# Altium PCB 驱动板.PcbDoc (part 1 of 3)
Units mil, origin at the board's own origin, x right, y up, seen from the top; angles counter-clockwise.
Board outline 6410.42 x 3130.03 mil, 2 copper layers (Top Layer, Bottom Layer); 60 components, 47 nets, 216 pads, 52 vias.
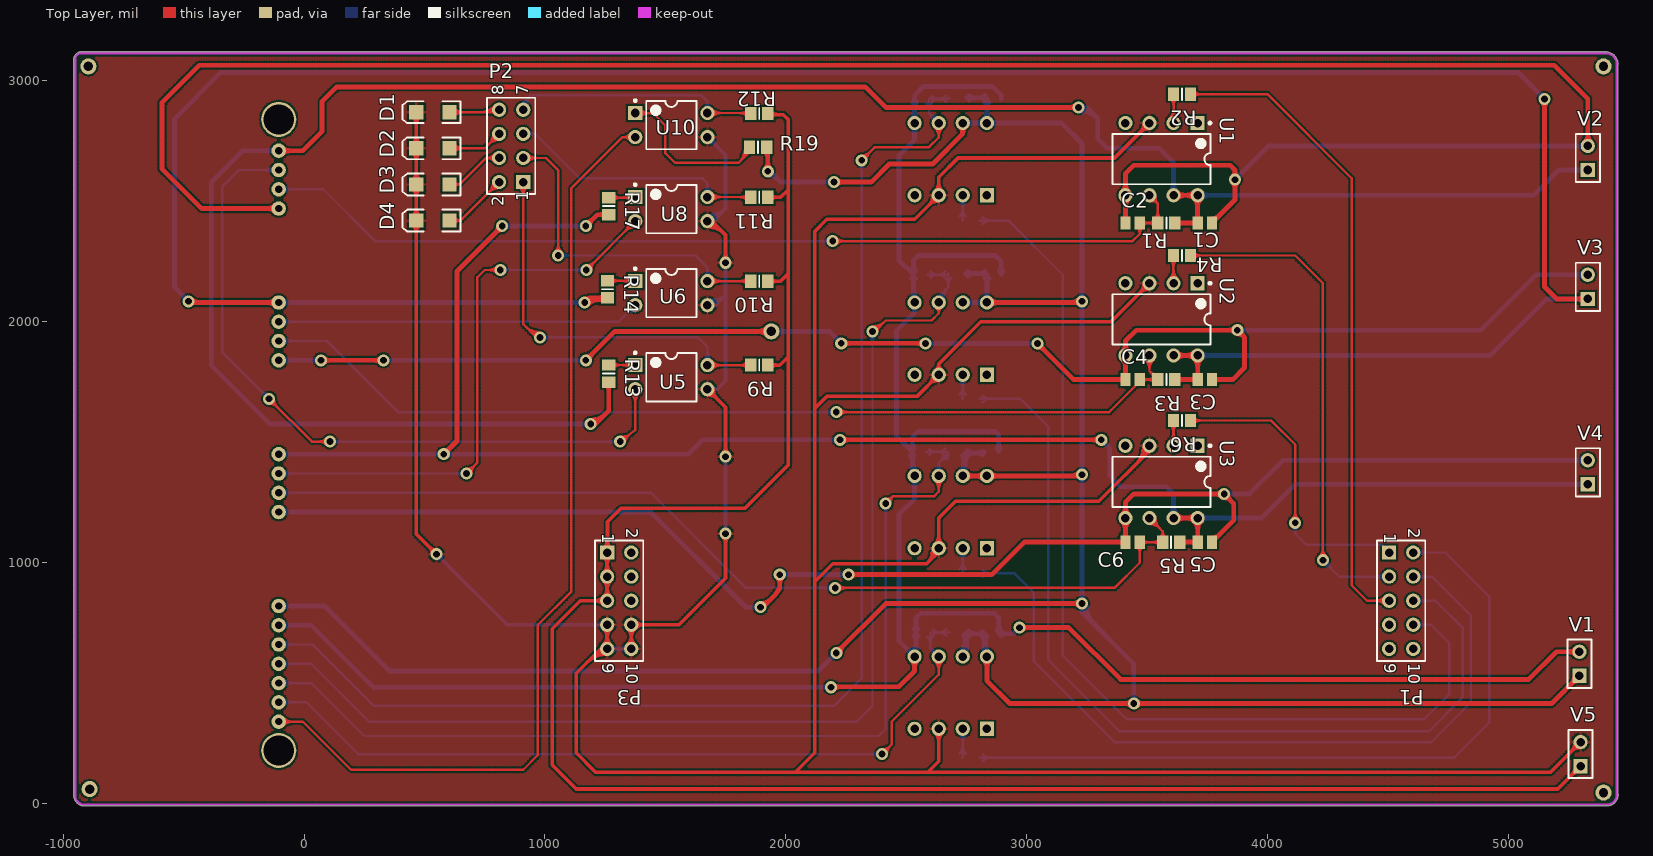
[diagram p0: Top Layer view]
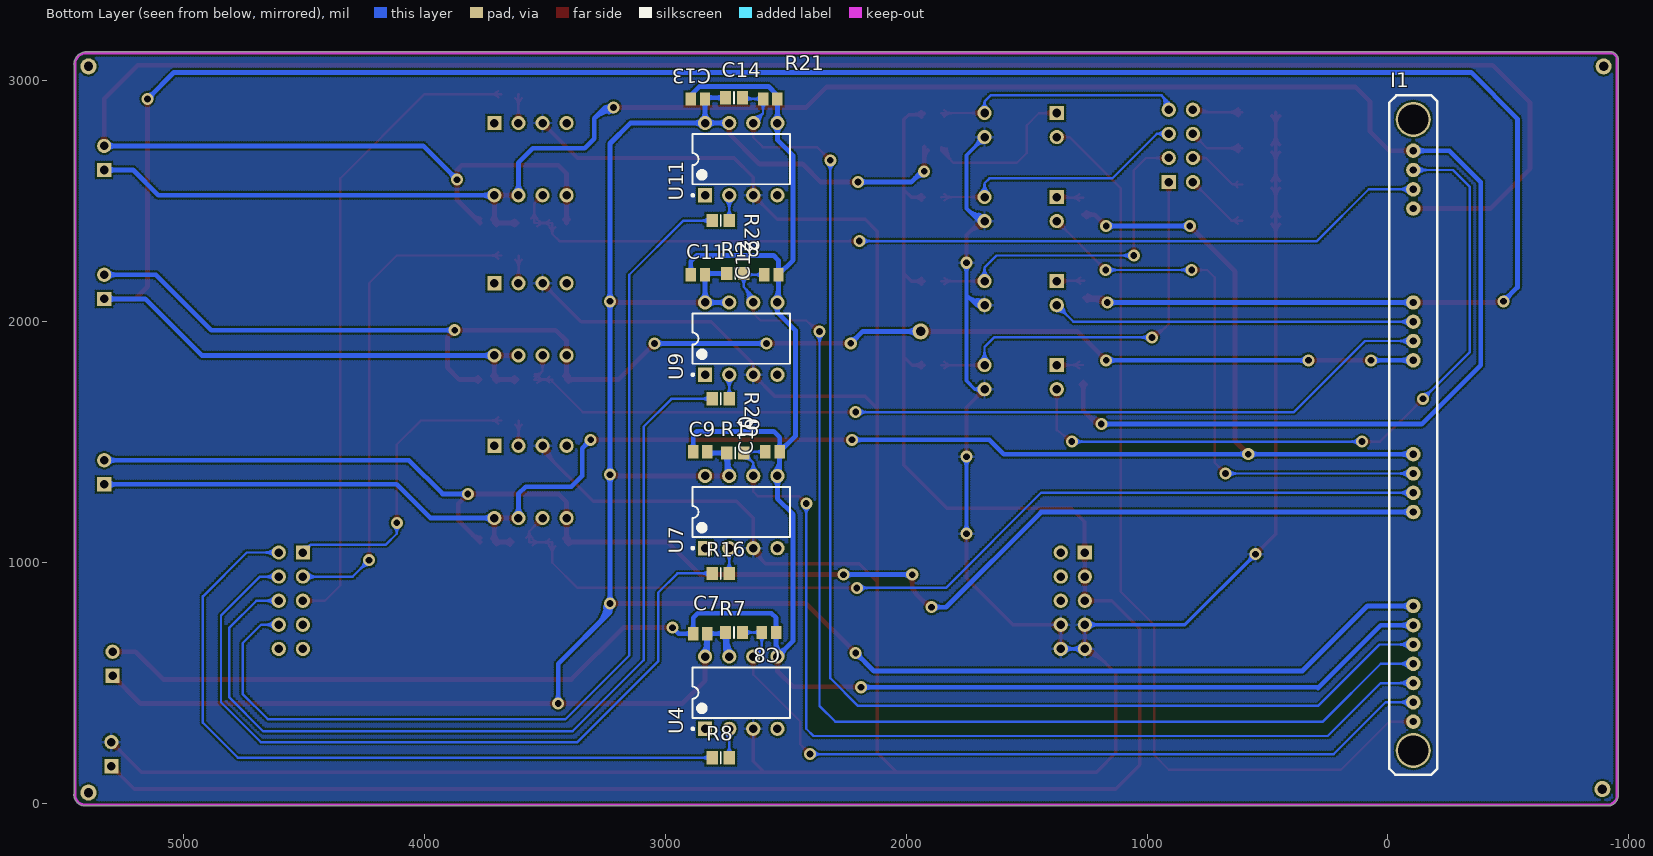
[diagram p1: Bottom Layer view, seen from below]

## Layer stack, top to bottom
Top Layer: signal copper 1.4
Dielectric: dielectric 12.6, FR-4, Dk 4.8
Bottom Layer: signal copper 1.4

## Board outline
-955.02,25 -955.02,29.84 cw(c-912.5,32.5) -955.02,35.16 -955.02,3095 cw(c-950,3095) -953.88,3098.18 cw(c-925,3090) -933.18,3118.88 cw(c-930,3115) -930,3120.02 5410,3120.02 cw(c5410,3115) 5410.55,3119.98 cw(c5405,3070) 5455.29,3070 cw(c5405,3070) 5455.01,3064.73 5455.01,40.3 cw(c5410,35) 5455.33,35 cw(c5410,35) 5454.98,29.38 cw(c5410,35) 5415.62,-9.98 cw(c5415,-5) 5415,-10.01 -920,-10.01 cw(c-920,-5) -923.41,-8.68 cw(c-912.5,32.5) -953.68,21.59 cw(c-950,25)

## Design rules (kind name [scope] priority, off if disabled: settings)
Clearance [All] p1: gap=8
HoleSize [All] p1: absolutevalues=TRUE maxlimit=130 minlimit=1 maxpercent=80.000 minpercent=20.000
MinimumSolderMaskSliver [All] p1 off: minsoldermaskwidth=10
PolygonConnect [All] p1: connectstyle=Relief reliefconductorwidth=10 reliefentries=4 polygonreliefangle="90 Angle" airgapwidth=10
RoutingVias [All] p1: holewidth=25 width=40 viastyle="Through Hole" minholewidth=28 minwidth=50 maxholewidth=28 maxwidth=50
SilkToSilkClearance [All] p1 off: silktosilkclearance=10
SilkToSolderMaskClearance [IsPad] p1 off: minsilkscreentomaskgap=10 clearancetoexposedcopper=TRUE
SolderMaskExpansion [All] p1: expansion=4
Width NGND [InNet('IPM_NGND')] p1: maxlimit=30 minlimit=10 preferedwidth=20
Width NVCC [InNet('IPM_NVCC')] p2: maxlimit=30 minlimit=10 preferedwidth=20
Width WGND [InNet('IPM_WGND')] p3: maxlimit=30 minlimit=10 preferedwidth=20
Width WVCC [InNet('IPM_WVCC')] p4: maxlimit=30 minlimit=10 preferedwidth=20
Width VGND [InNet('IPM_VGND')] p5: maxlimit=30 minlimit=10 preferedwidth=20
Width VVCC [InNet('IPM_VVCC')] p6: maxlimit=30 minlimit=10 preferedwidth=20
Width UGND [InNet('IPM_UGND')] p7: maxlimit=30 minlimit=10 preferedwidth=20
Width UVCC [InNet('IPM_UVCC')] p8: maxlimit=30 minlimit=10 preferedwidth=20
Width GND [InNet('GND')] p9: maxlimit=30 minlimit=10 preferedwidth=15
Width 5V [InNet('5V')] p10: maxlimit=30 minlimit=10 preferedwidth=15
Width [All] p11: maxlimit=10 minlimit=10 preferedwidth=10
24 further rules are at their usual default settings.

## Components (designator, comment, footprint, x,y, rotation, side; value= is the part's Value field where it differs from the comment)
C1 "Cap" C0805 3740,2410 r180 top
C2 "Cap" C0805 3440,2410 r0 top
C3 "Cap" C0805 3740,1760 r180 top
C4 "Cap" C0805 3440,1760 r0 top
C5 "Cap" C0805 3740,1085 r180 top
C6 "Cap" C0805 3440,1085 r0 top
C7 "Cap" C0805 2855,705 r180 bottom
C8 "Cap" C0805 2570,710 r0 bottom
C9 "Cap" C0805 2855,1460 r180 bottom
C10 "Cap" C0805 2555,1460 r0 bottom
C11 "Cap" C0805 2865,2195 r180 bottom
C12 "Cap" C0805 2560,2195 r0 bottom
C13 "Cap" C0805 2865,2925 r180 bottom
C14 "Cap" C0805 2565,2925 r0 bottom
D1 "LED" 3.2X1.6X1.1 535,2870 r180 top
D2 "LED" 3.2X1.6X1.1 535,2720 r180 top
D3 "LED" 3.2X1.6X1.1 535,2570 r180 top
D4 "LED" 3.2X1.6X1.1 535,2420 r180 top
I1 "ipm" ipm -105,2710 r180 bottom
P1 "Header 5X2" HDR2X5 4505,1041.85 r270 top
P2 "Header 4X2" HDR2X4 910,2580 r90 top
P3 "Header 5X2" HDR2X5 1258.46,1041.85 r270 top
R1 "Res2" 6-0805_N 3580,2410 r180 top
R2 "Res2" 6-0805_N 3645,2945 r180 top
R3 "Res2" 6-0805_N 3580,1760 r180 top
R4 "Res2" 6-0805_N 3645,2275 r180 top
R5 "Res2" 6-0805_N 3600,1085 r180 top
R6 "Res2" 6-0805_N 3645,1590 r180 top
R7 "Res2" 6-0805_N 2715,710 r180 bottom
R8 "Res2" 6-0805_N 2770,190 r180 bottom
R9 "Res" 6-0805_N 1890,1820 r180 top
R10 "Res" 6-0805_N 1890,2168.33 r180 top
R11 "Res" 6-0805_N 1890,2516.67 r180 top
R12 "Res" 6-0805_N 1890,2865 r180 top
R13 "Res Pack2" 6-0805_N 1265,1785 r270 top
R14 "Res" 6-0805_N 1260,2135 r270 top
R15 "Res2" 6-0805_N 2710,1455 r180 bottom
R16 "Res2" 6-0805_N 2770,955 r180 bottom
R17 "Res" 6-0805_N 1265,2480 r270 top
R18 "Res2" 6-0805_N 2710,2200 r180 bottom
R19 "Res" 6-0805_N 1885,2725 r0 top
R20 "Res2" 6-0805_N 2770,1680 r180 bottom
R21 "Res2" 6-0805_N 2715,2930 r180 bottom
R22 "Res2" 6-0805_N 2770,2420 r180 bottom
U1 "4504" DIP-8 3560,2675 r270 top
U2 "4504" DIP-8 3560,2010 r270 top
U3 "4504" DIP-8 3560,1335 r270 top
U4 "4504" DIP-8 2685,460 r90 bottom
U5 "P521" DIP-4 1525,1770 r0 top
U6 "P521" DIP-4 1525,2118.89 r0 top
U7 "4504" DIP-8 2685,1210 r90 bottom
U8 "P521" DIP-4 1525,2467.78 r0 top
U9 "4504" DIP-8 2685,1930 r90 bottom
U10 "P521" DIP-4 1525,2816.67 r0 top
U11 "4504" DIP-8 2685,2675 r90 bottom
V1 "Header 2" HDR1X2 5295,530 r90 top
V2 "Header 2" HDR1X2 5330,2630 r90 top
V3 "Header 2" HDR1X2 5330,2095 r90 top
V4 "Header 2" HDR1X2 5330,1325 r90 top
V5 "Header 2" HDR1X2 5300,155 r90 top

## Footprints (in the part's own frame and the unit in brackets; to place one, negate y for a bottom-side part, rotate by r counter-clockwise, add the part's x,y. Pads: shape width x height; smd on the part's side, far side on the other; paste and mask are expansions set on the pad)
3.2X1.6X1.1 [mm] "SMT LED; 2 Flat Leads"
  rect 1.5x1.5 smd: 1(-1.75,0) 2(1.75,0)
  silkscreen extent -2.9,-1.15 3.2,1.15
6-0805_N [mm] "Chip Resistor, Body 2.0x1.2mm, IPC Medium Density"
  rect 1.2x1.4 smd: 1(-0.9,0) 2(0.9,0)
  silkscreen extent 0,-0.6 0,0.6, body extent -1.07,-0.7 1.07,0.7, height 0.7
C0805 [mm] "Chip Capacitor, Body 2.0x1.3mm, IPC High Density"
  rect 1.1x1.4 smd: 1(-0.75,0) 2(0.75,0)
  body extent -1.1,-0.72 1.1,0.72, height 1.4
DIP-4 [mm] "DIP; 4 Leads; Row Spacing 7.62 mm; Pitch 2.54 mm"
  rect 1.5x1.5 hole 0.9: 1(-3.81,1.27)
  round 1.5 hole 0.9: 2(-3.81,-1.27) 3(3.81,-1.27) 4(3.81,1.27)
  silkscreen extent -3.93,-2.55 2.65,2.69, body extent -3.15,-2.5 3.15,2.5, height 5.6
DIP-8 [mm] "DIP; 8 Leads; Row Spacing 7.62 mm; Pitch 2.54 mm"
  rect 1.5x1.5 hole 0.9: 1(-3.81,3.81)
  round 1.5 hole 0.9: 2(-3.81,1.27) 3(-3.81,-1.27) 4(-3.81,-3.81) 5(3.81,-3.81) 6(3.81,-1.27) 7(3.81,1.27) 8(3.81,3.81)
  silkscreen extent -3.93,-5.15 2.65,5.24, body extent -3.6,-5.15 3.6,5.15, height 5.08
HDR1X2 [mm] "Connector; Header; 2 Position"
  rect 1.5x1.5 hole 0.9: 1(0,0)
  round 1.5 hole 0.9: 2(2.54,0)
  silkscreen extent -1.27,-1.27 3.81,1.27
HDR2X4 [mm] "Connector; Header; 4x2 Position"
  rect 1.5x1.5 hole 0.9: 1(0,0)
  round 1.5 hole 0.9: 2(0,2.54) 3(2.54,0) 4(2.54,2.54) 5(5.08,0) 6(5.08,2.54) 7(7.62,0) 8(7.62,2.54)
  silkscreen extent -1.27,-1.27 8.89,3.81
HDR2X5 [mm] "Connector; Header; 5x2 Position"
  rect 1.5x1.5 hole 0.9: 1(0,0)
  round 1.5 hole 0.9: 2(0,2.54) 3(2.54,0) 4(2.54,2.54) 5(5.08,0) 6(5.08,2.54) 7(7.62,0) 8(7.62,2.54) 9(10.16,0) 10(10.16,2.54)
  silkscreen extent -1.27,-1.27 11.43,3.81
ipm [mil]
  round 60 hole 30: 1(0,0) 2(0,-80) 3(0,-160) 4(0,-240) 5(0,-630) 6(0,-710) 7(0,-790) 8(0,-870) 9(0,-1260) 10(0,-1340) 11(0,-1420) 12(0,-1500) 13(0,-1890) 14(0,-1970) 15(0,-2050) 16(0,-2130) 17(0,-2210) 18(0,-2290) 19(0,-2370)
  round 145.67 hole 125.98: 20(0,130) 21(0,-2490)
  silkscreen extent -100,-2590 100,230

## Part data
C1 C2 C3 C4 C5 C6 C7 C8 C9 C10 C11 C12 C13 C14: "Capacitor"
P1 P3: "Header, 5-Pin, Dual row"
P2: "Header, 4-Pin, Dual row"
R1 R2 R3 R4 R5 R6 R7 R8 R15 R16 R18 R20 R21 R22: "Resistor"
R9 R10 R11 R12 R14 R17 R19: "电阻"
R13: library part Res, "电阻"
U5 U6 U8 U10: library part Optoisolator1, "4-Pin Phototransistor Optocoupler"
V1 V2 V3 V4 V5: "Header, 2-Pin"

## Free pads (board coordinates)
  round 66.93 hole 39.37: 0(1940,1960) 1(-895,3060) 2(5395,3060) 3(5395,45) 4(-890,60)

## Via types
v1: diameter 50, hole 28, Top Layer to Bottom Layer, 52 vias

## Nets (pads, with @x,y where several pads share a name; then routed paths per layer and width w, separated by ;. In a path a pad name is that pad's centre, name@x,y a point inside that pad or via, vN(x,y) a via of type N, cw(c..) or ccw(c..) an arc to the next point about the centre after c; other vN are vias at no path point)
5V: P3.1 P3.3 P3.5 R9.1 R10.1 R11.1 R12.1 V5.1 | length 9322.7
  Top Layer w15: P3.5@1231.3,841.85 1146.85,841.85 1030,725 1030,160 1130,60 5205,60 V5.1@5300,155 ; P3.5@1242.89,826.27 ccw(c1205.29,788.67) 1205.29,841.85 ccw(c1205.29,895.03) 1242.89,857.43 ccw(c1205.29,895.03) 1258.47,895.03 ccw(c1311.64,895.03) P3.5@1274.04,857.43 ; P3.3@1242.89,926.27 cw(c1205.29,888.67) 1258.47,888.67 cw(c1311.64,888.67) P3.3@1274.04,926.27 ; P3.3@1242.89,957.43 ccw(c1205.29,995.03) 1258.47,995.03 ccw(c1311.64,995.03) P3.3@1274.04,957.43 ; P3.1@1242.89,1026.27 cw(c1205.29,988.67) 1258.47,988.67 cw(c1311.64,988.67) P3.1@1274.04,1026.27 ; P3.1@1242.89,1057.43 ccw(c1201.58,1098.73) 1260,1098.73 ; P3.5@1258.47,841.85 P3.3@1258.47,941.85 P3.1@1258.47,1041.85 ; P3.1@1260,1041.85 1260,1170 1315,1225 1830,1225 2010,1405 2010,1855 ; 1260,1091.32 ccw(c1307.94,1091.32) P3.1@1274.04,1057.43 ; R9.1@1925.43,1820 1975,1820 2010,1855 ; R10.1@1925.43,2168.33 1978.33,2168.33 2010,2200 ; R11.1@1925.43,2516.67 1978.33,2516.67 2010,2548.33 ; R12.1@1925.43,2865 1930.43,2860 1990,2860 2010,2840 2010,2548.33 ; 1964.35,1820 cw(c1964.35,1858.92) 1936.83,1831.4 ccw(c1964.35,1858.92) 1964.35,1820 ; 1964.35,1820 ccw(c1964.35,1781.08) 1936.83,1808.6 cw(c1964.35,1781.08) 1964.35,1820 ; 1964.35,2168.33 cw(c1964.35,2207.26) 1936.83,2179.73 ccw(c1964.35,2207.26) 1964.35,2168.33 ; 1964.35,2168.33 ccw(c1964.35,2129.41) 1936.83,2156.93 cw(c1964.35,2129.41) 1964.35,2168.33 ; 1964.35,2516.67 cw(c1964.35,2555.59) 1936.83,2528.07 ccw(c1964.35,2555.59) 1964.35,2516.67 ; 1964.35,2516.67 ccw(c1964.35,2477.74) 1936.83,2505.27 cw(c1964.35,2477.74) 1964.35,2516.67 ; 2010,1855 2010,2200 ; 2010,2200 2010,2548.33 ; 5262.4,117.4 cw(c5300,79.79) 5300,132.97 ccw(c5300,79.79) 5262.4,117.4 ; 5262.4,117.4 ccw(c5224.79,155) 5277.97,155 cw(c5224.79,155) 5262.4,117.4 ; R12.1@1936.83,2849.66 cw(c1961.79,2824.71) 1961.79,2860 ccw(c1961.79,2824.71) R12.1@1936.83,2849.66 ; R12.1@1936.83,2872.46 ccw(c1966.92,2902.55) 1966.92,2860 cw(c1966.92,2902.55) R12.1@1936.83,2872.46
BREAK: P1.8 R22.1 | length 4605.3
  Bottom Layer w10: R22.1@2805.43,2420 2925,2420 3150,2195 3150,615 3415,350 4650,350 4755,455 4755,665 4678.15,741.85 P1.8@4605,741.85 ; 2850.39,2420 cw(c2850.39,2464.96) 2818.6,2433.17 ccw(c2850.39,2464.96) 2850.39,2420 ; 2850.39,2420 ccw(c2850.39,2375.04) 2818.6,2406.83 cw(c2850.39,2375.04) 2850.39,2420 ; 4640.07,741.85 cw(c4640.07,776.92) 4615.27,752.12 ccw(c4640.07,776.92) 4640.07,741.85 ; 4640.07,741.85 ccw(c4640.07,706.78) 4615.27,731.58 cw(c4640.07,706.78) 4640.07,741.85 ; 4664.21,741.85 cw(c4664.21,801.06) 4622.34,759.19 ccw(c4664.21,801.06) 4664.21,741.85 ; 4664.21,741.85 ccw(c4664.21,682.64) 4622.34,724.51 cw(c4664.21,682.64) 4664.21,741.85
FO: P2.7 R12.2 U10.4 | length 2046.6
  Top Layer w10: U10.4@1675,2866.67 1852.9,2866.67 R12.2@1854.57,2865 ; 1710.07,2866.67 cw(c1710.07,2901.74) 1685.27,2876.94 ccw(c1710.07,2901.74) 1710.07,2866.67 ; 1710.07,2866.67 ccw(c1710.07,2831.59) 1685.27,2856.39 cw(c1710.07,2831.59) 1710.07,2866.67 ; 1734.21,2866.67 cw(c1734.21,2925.88) 1692.34,2884.01 ccw(c1734.21,2925.88) 1734.21,2866.67 ; 1734.21,2866.67 ccw(c1734.21,2807.45) 1692.34,2849.32 cw(c1734.21,2807.45) 1734.21,2866.67 ; 1805.59,2866.67 cw(c1805.59,2816.02) 1841.4,2851.83 ccw(c1805.59,2816.02) 1805.59,2866.67 ; 1813.63,2866.67 ccw(c1813.63,2905.93) 1841.4,2878.17 cw(c1813.63,2905.93) 1813.63,2866.67 ; 1829.73,2866.67 cw(c1829.73,2840.16) 1848.47,2858.9 ccw(c1829.73,2840.16) 1829.73,2866.67
  Bottom Layer w10: P2.7@910,2880 910,2910 ; U10.4@1675,2866.67 1675,2915 ; 910,2910 cw(c903.92,2910) 905.13,2904.04 ccw(c903.92,2910) 910,2910 ; 910,2910 ccw(c916.08,2910) 914.87,2904.04 cw(c916.08,2910) 910,2910 ; 910,2910 940,2940 ; 940,2940 ccw(c970.13,2909.87) 931.97,2890.91 cw(c970.13,2909.87) 940,2940 ; 940,2940 1650,2940 1675,2915 ; 1675,2915 cw(c1639.64,2915) 1660.52,2886.46 ccw(c1639.64,2915) 1675,2915 ; 1675,2915 ccw(c1710.36,2915) 1689.48,2886.46 cw(c1710.36,2915) 1675,2915 ; P2.7@905.1,2877.57 cw(c930.69,2890.28) 910.49,2910.49 ccw(c930.69,2890.28) P2.7@905.1,2877.57 ; P2.7@914.05,2882.01 cw(c943.84,2896.81) 920.32,2920.32 ccw(c943.84,2896.81) P2.7@914.05,2882.01 ; P2.7@923.01,2886.46 cw(c956.98,2903.34) 930.16,2930.16 ccw(c956.98,2903.34) P2.7@923.01,2886.46
GND: D1.2 D2.2 D3.2 D4.2 P3.7 P3.8 P3.9 P3.10 U1.3 U2.3 U3.3 U4.3 U5.3 U6.3 U7.3 U8.3 U9.3 U10.3 U11.3 V5.2 | length 25348.2
  Top Layer w15: D1.2@466.1,2870 D2.2@466.1,2720 D3.2@466.1,2570 D4.2@466.1,2420 466.1,1118.9 v1(550,1035) ; 524.04,1059.45 cw(c515.6,1027.96) v1@547.55,1034.5 ; 525.55,1060.96 ccw(c557.04,1069.4) v1@550.5,1037.45 ; 1174.49,585.04 cw(c1258.47,501.06) P3.9@1258.47,619.82 ; 1200.09,610.64 cw(c1258.47,552.27) P3.9@1258.47,634.82 ; 1225.7,636.25 cw(c1258.47,603.49) P3.9@1258.47,649.82 ; P3.9@1242.89,657.43 ccw(c1205.29,695.03) 1258.47,695.03 ccw(c1311.64,695.03) P3.9@1274.04,657.43 ; P3.7@1242.89,726.27 cw(c1205.29,688.67) 1258.47,688.67 cw(c1311.64,688.67) P3.7@1274.04,726.27 ; P3.7@1258.47,741.85 P3.9@1258.47,641.85 1231.3,641.85 1130,540.55 1130,210 1210,130 2040,130 ; P3.10@1342.89,657.43 ccw(c1305.29,695.03) 1358.47,695.03 ccw(c1411.64,695.03) P3.10@1374.04,657.43 ; P3.8@1342.89,726.27 cw(c1305.29,688.67) 1358.47,688.67 cw(c1411.64,688.67) 1374.04,726.27 cw(c1411.64,688.67) 1411.64,741.85 cw(c1411.64,795.03) P3.8@1374.04,757.43 ; P3.10@1358.47,641.85 P3.8@1358.47,741.85 1556.85,741.85 1750,935 v1(1750,1120) ; U5.3@1667.19,1718.4 ccw(c1698.58,1724.83) 1690.29,1693.88 ; U8.3@1667.74,2414.48 ccw(c1708.16,2432.82) 1696.68,2389.94 ; U5.3@1675,1720 1750,1645 v1(1750,1440) ; U8.3@1675,2417.78 1692.22,2417.78 1750,2360 v1(1750,2245) ; U5.3@1676.6,1727.81 cw(c1670.17,1696.42) 1701.12,1704.71 ; U8.3@1681.4,2420.68 ccw(c1745.56,2449.77) 1727.32,2381.73 ; U8.3@1686.01,2398.7 cw(c1701.02,2372.72) 1708.78,2401.7 ; 2120,920 2195,995 2585,995 2635,1045 U7.3@2635,1060 2635,1185 2705,1255 3300,1255 3510,1465 U3.3@3510,1485 ; 2599.42,1009.43 cw(c2663.81,992.18) U7.3@2637.75,1053.53 ; 2607.39,1039.15 cw(c2648.54,1028.12) U7.3@2631.88,1067.34 ; 2608.88,1764.71 cw(c2639.83,1756.42) U9.3@2633.4,1787.81 ; 2608.88,2509.71 cw(c2639.83,2501.42) U11.3@2633.4,2532.81 ; U7.3@2615.92,1048.99 cw(c2589.94,1033.98) 2618.92,1026.22 ; 2619.71,1753.88 ccw(c2611.42,1784.83) U9.3@2642.81,1778.4 ; 2619.71,2498.88 ccw(c2611.42,2529.83) U11.3@2642.81,2523.4 ; U4.3@2635,310 2635,175 2590,130 ; 3473.37,1430.48 cw(c3546.13,1410.99) U3.3@3513.08,1478.68 ; 3481.89,1462.29 cw(c3526.98,1450.21) U3.3@3506.5,1492.16 ; 3483.88,2144.71 cw(c3514.83,2136.42) U2.3@3508.4,2167.81 ; 3483.88,2809.71 cw(c3514.83,2801.42) U1.3@3508.4,2832.81 ; U3.3@3490.92,1473.99 cw(c3464.94,1458.98) 3493.92,1451.22 ; 3494.71,2133.88 ccw(c3486.42,2164.83) U2.3@3517.81,2158.4 ; 3494.71,2798.88 ccw(c3486.42,2829.83) U1.3@3517.81,2823.4 ; U2.3@3510,2160 3350,2000 2810,2000 2635,1825 ; U1.3@3510,2825 3365,2680 2715,2680 2635,2600 U11.3@2635,2525 2535,2425 2170,2425 2120,2375 2120,1640 ; 5273.88,239.71 cw(c5304.83,231.42) V5.2@5298.4,262.81 ; 5284.71,228.88 ccw(c5276.42,259.83) V5.2@5307.81,253.4 ; V5.2@5300,255 5175,130 2590,130 ; 466.1,2366.82 cw(c519.28,2366.82) 481.68,2404.42 ccw(c519.28,2366.82) 466.1,2366.82 ; 466.1,2366.82 ccw(c412.92,2366.82) 450.53,2404.42 cw(c412.92,2366.82) 466.1,2366.82 ; 466.1,2473.18 cw(c412.92,2473.18) 450.53,2435.58 ccw(c412.92,2473.18) 466.1,2473.18 ; 466.1,2473.18 ccw(c519.28,2473.18) 481.68,2435.58 cw(c519.28,2473.18) 466.1,2473.18 ; 466.1,2516.82 cw(c519.28,2516.82) 481.68,2554.42 ccw(c519.28,2516.82) 466.1,2516.82 ; 466.1,2516.82 ccw(c412.92,2516.82) 450.53,2554.42 cw(c412.92,2516.82) 466.1,2516.82 ; 466.1,2623.18 cw(c412.92,2623.18) 450.53,2585.58 ccw(c412.92,2623.18) 466.1,2623.18 ; 466.1,2623.18 ccw(c519.28,2623.18) 481.68,2585.58 cw(c519.28,2623.18) 466.1,2623.18 ; 466.1,2666.82 cw(c519.28,2666.82) 481.68,2704.42 ccw(c519.28,2666.82) 466.1,2666.82 ; 466.1,2666.82 ccw(c412.92,2666.82) 450.53,2704.42 cw(c412.92,2666.82) 466.1,2666.82 ; 466.1,2773.18 cw(c412.92,2773.18) 450.53,2735.58 ccw(c412.92,2773.18) 466.1,2773.18 ; 466.1,2773.18 ccw(c519.28,2773.18) 481.68,2735.58 cw(c519.28,2773.18) 466.1,2773.18 ; 466.1,2816.82 cw(c519.28,2816.82) 481.68,2854.42 ccw(c519.28,2816.82) 466.1,2816.82 ; 466.1,2816.82 ccw(c412.92,2816.82) 450.53,2854.42 cw(c412.92,2816.82) 466.1,2816.82 ; 520.13,1064.87 cw(c490.25,1035) 532.5,1035 ccw(c490.25,1035) 520.13,1064.87 ; 520.13,1064.87 ccw(c550,1094.75) 550,1052.5 cw(c550,1094.75) 520.13,1064.87 ; 1712.6,1682.4 cw(c1750.21,1720) 1697.03,1720 ccw(c1750.21,1720) 1712.6,1682.4 ; 1712.6,1682.4 ccw(c1675,1644.79) 1675,1697.97 cw(c1675,1644.79) 1712.6,1682.4 ; 1750,1077.75 cw(c1792.25,1077.75) 1762.37,1107.63 ccw(c1792.25,1077.75) 1750,1077.75 ; 1750,1077.75 ccw(c1707.75,1077.75) 1737.63,1107.63 cw(c1707.75,1077.75) 1750,1077.75 ; 1750,1482.25 cw(c1707.75,1482.25) 1737.63,1452.37 ccw(c1707.75,1482.25) 1750,1482.25 ; 1750,1482.25 ccw(c1792.25,1482.25) 1762.37,1452.37 cw(c1792.25,1482.25) 1750,1482.25 ; 1750,2287.25 cw(c1707.75,2287.25) 1737.63,2257.37 ccw(c1707.75,2287.25) 1750,2287.25 ; 1750,2287.25 ccw(c1792.25,2287.25) 1762.37,2257.37 cw(c1792.25,2287.25) 1750,2287.25 ; 2040,130 2590,130 ; 2040,130 2120,210 2120,1640 ; 2120,1640 2170,1690 2545,1690 U9.3@2635,1780 2635,1825 ; 2597.4,1742.4 cw(c2635,1704.79) 2635,1757.97 ccw(c2635,1704.79) 2597.4,1742.4 ; 2597.4,1742.4 ccw(c2559.79,1780) 2612.97,1780 cw(c2559.79,1780) 2597.4,1742.4 ; 2597.4,2487.4 cw(c2635,2449.79) 2635,2502.97 ccw(c2635,2449.79) 2597.4,2487.4 ; 2597.4,2487.4 ccw(c2559.79,2525) 2612.97,2525 cw(c2559.79,2525) 2597.4,2487.4 ; 2635,256.82 cw(c2688.18,256.82) 2650.58,294.42 ccw(c2688.18,256.82) 2635,256.82 ; 2635,256.82 ccw(c2581.82,256.82) 2619.42,294.42 cw(c2581.82,256.82) 2635,256.82 ; 2635,1113.18 cw(c2581.82,1113.18) 2619.42,1075.58 ccw(c2581.82,1113.18) 2635,1113.18 ; 2635,1113.18 ccw(c2688.18,1113.18) 2650.58,1075.58 cw(c2688.18,1113.18) 2635,1113.18 ; 2635,1825 cw(c2600.05,1825) 2621.49,1797.4 ccw(c2600.05,1825) 2635,1825 ; 2635,1825 ccw(c2669.95,1825) 2648.51,1797.4 cw(c2669.95,1825) 2635,1825 ; 2635,2578.18 cw(c2581.82,2578.18) 2619.42,2540.58 ccw(c2581.82,2578.18) 2635,2578.18 ; 2635,2578.18 ccw(c2688.18,2578.18) 2650.58,2540.58 cw(c2688.18,2578.18) 2635,2578.18 ; 3472.4,2122.4 cw(c3510,2084.79) 3510,2137.97 ccw(c3510,2084.79) 3472.4,2122.4 ; 3472.4,2122.4 ccw(c3434.79,2160) 3487.97,2160 cw(c3434.79,2160) 3472.4,2122.4 ; 3472.4,2787.4 cw(c3510,2749.79) 3510,2802.97 ccw(c3510,2749.79) 3472.4,2787.4 ; 3472.4,2787.4 ccw(c3434.79,2825) 3487.97,2825 cw(c3434.79,2825) 3472.4,2787.4 ; 5262.4,217.4 cw(c5300,179.79) 5300,232.97 ccw(c5300,179.79) 5262.4,217.4 ; 5262.4,217.4 ccw(c5224.79,255) 5277.97,255 cw(c5224.79,255) 5262.4,217.4 ; U8.3@1675,2395.75 cw(c1675,2300.99) 1742,2368 ccw(c1675,2300.99) U8.3@1675,2395.75 ; U8.3@1675,2410.75 cw(c1675,2352.21) 1716.4,2393.6 ccw(c1675,2352.21) U8.3@1675,2410.75 ; 2586.79,996.79 ccw(c2523.58,1060) 2612.97,1060 cw(c2523.58,1060) 2586.79,996.79 ; 2612.4,1022.4 ccw(c2574.79,1060) 2627.97,1060 cw(c2574.79,1060) 2612.4,1022.4 ; 2623,1033 cw(c2635,1021.01) 2635,1037.97 ccw(c2635,1021.01) 2623,1033 ; 3458.25,1413.25 ccw(c3386.51,1485) 3487.97,1485 cw(c3386.51,1485) 3458.25,1413.25 ; 3483.86,1438.86 ccw(c3437.72,1485) 3502.97,1485 cw(c3437.72,1485) 3483.86,1438.86
  Bottom Layer w15: v1(550,1035) 843.15,741.85 P3.7@1258.47,741.85 ; P3.7@1242.89,726.27 ccw(c1205.29,688.67) 1205.29,741.85 ccw(c1205.29,795.03) P3.7@1242.89,757.43 ; P3.9@1258.47,641.85 P3.10@1358.47,641.85 ; P3.9@1274.04,626.27 cw(c1311.64,588.67) 1311.64,641.85 cw(c1311.64,695.03) P3.9@1274.04,657.43 ; P3.10@1342.89,626.27 ccw(c1305.29,588.67) 1305.29,641.85 ccw(c1305.29,695.03) P3.10@1342.89,657.43 ; U8.3@1668,2421.6 cw(c1711.3,2397.94) 1699.31,2445.8 ; U6.3@1669.22,2074.38 cw(c1707.94,2037.61) 1706.56,2090.99 ; U5.3@1675,1720 1715,1720 ; U6.3@1675,2068.89 1708.89,2068.89 ; U8.3@1675,2417.78 1697.78,2417.78 1750,2470 ; U10.3@1675,2766.67 1750,2691.67 1750,2470 ; U6.3@1680.1,2064.05 cw(c1709.21,2036.41) 1708.17,2076.54 ; U8.3@1681.17,2414.41 cw(c1752.22,2375.57) 1732.55,2454.12 ; U8.3@1686.33,2436.67 ccw(c1701.76,2462.4) 1709.04,2433.3 ; U6.3@1690.17,2084.86 ccw(c1710.82,2106.62) 1711.6,2076.63 ; v1(1750,1120) v1(1750,1440) ; v1(1750,2245) 1750,2110 ; 579.87,1005.13 cw(c609.75,1035) 567.5,1035 ccw(c609.75,1035) 579.87,1005.13 ; 579.87,1005.13 ccw(c550,975.25) 550,1017.5 cw(c550,975.25) 579.87,1005.13 ; 1708.89,2068.89 cw(c1708.89,2083.94) 1695.13,2077.83 ccw(c1708.89,2083.94) 1708.89,2068.89 ; 1708.89,2068.89 ccw(c1708.89,2053.84) 1695.13,2059.95 cw(c1708.89,2053.84) 1708.89,2068.89 ; 1708.89,2068.89 1750,2110 ; 1712.6,2729.06 cw(c1750.21,2766.67) 1697.03,2766.67 ccw(c1750.21,2766.67) 1712.6,2729.06 ; 1712.6,2729.06 ccw(c1675,2691.46) 1675,2744.64 cw(c1675,2691.46) 1712.6,2729.06 ; 1715,1720 cw(c1715,1745.3) 1693.62,1731.78 ccw(c1715,1745.3) 1715,1720 ; 1715,1720 ccw(c1715,1694.7) 1693.62,1708.22 cw(c1715,1694.7) 1715,1720 ; 1715,1720 1750,1755 1750,2110 ; 1750,1162.25 cw(c1707.75,1162.25) 1737.63,1132.37 ccw(c1707.75,1162.25) 1750,1162.25 ; 1750,1162.25 ccw(c1792.25,1162.25) 1762.37,1132.37 cw(c1792.25,1162.25) 1750,1162.25 ; 1750,1397.75 cw(c1792.25,1397.75) 1762.37,1427.63 ccw(c1792.25,1397.75) 1750,1397.75 ; 1750,1397.75 ccw(c1707.75,1397.75) 1737.63,1427.63 cw(c1707.75,1397.75) 1750,1397.75 ; 1750,2110 cw(c1697.5,2162.5) 1680.15,2090.31 ccw(c1697.5,2162.5) 1750,2110 ; 1750,2202.75 cw(c1792.25,2202.75) 1762.37,2232.63 ccw(c1792.25,2202.75) 1750,2202.75 ; 1750,2202.75 ccw(c1707.75,2202.75) 1737.63,2232.63 cw(c1707.75,2202.75) 1750,2202.75 ; 1750,2470 cw(c1677.07,2542.93) 1675.36,2439.8 ccw(c1677.07,2542.93) 1750,2470 ; U6.3@1673.14,2061.14 ccw(c1682.82,2101.44) 1712.13,2072.13 cw(c1682.82,2101.44) U6.3@1673.14,2061.14 ; U8.3@1675.12,2424.8 ccw(c1676.25,2493.7) 1724.98,2444.98 cw(c1676.25,2493.7) U8.3@1675.12,2424.8 ; U6.3@1676.64,2075.72 ccw(c1690.16,2131.97) 1731.06,2091.06 cw(c1690.16,2131.97) U6.3@1676.64,2075.72
IPM_BREAK: C14.2 I1.15 R21.2 U11.6 | length 7088.2
  Top Layer w10: 2340.2,2696.75 ccw(c2349.24,2662.99) v1(2315,2670) ; 2341.75,2695.2 cw(c2307.99,2704.24) v1(2315,2670) ; U11.6@2635,2825 2635,2765 2595,2725 2370,2725 v1(2315,2670) ; 2349.14,2704.14 cw(c2315,2738.28) 2315,2690 ccw(c2315,2738.28) 2349.14,2704.14 ; 2349.14,2704.14 ccw(c2383.28,2670) 2335,2670 cw(c2383.28,2670) 2349.14,2704.14 ; 2635,2765.79 cw(c2694.21,2765.79) 2652.34,2807.66 ccw(c2694.21,2765.79) 2635,2765.79 ; 2635,2765.79 ccw(c2575.79,2765.79) 2617.66,2807.66 cw(c2575.79,2765.79) 2635,2765.79 ; 2635,2789.93 cw(c2670.07,2789.93) 2645.27,2814.73 ccw(c2670.07,2789.93) 2635,2789.93 ; 2635,2789.93 ccw(c2599.93,2789.93) 2624.73,2814.73 cw(c2599.93,2789.93) 2635,2789.93
  Bottom Layer w10: I1.15@-105,660 35,660 290,405 2200,405 2315,520 v1(2315,2670) ; 2604.81,2849.04 ccw(c2643.74,2858.47) U11.6@2633.62,2819.71 ; 2610.96,2855.19 cw(c2601.53,2816.26) U11.6@2640.29,2826.38 ; U11.6@2635,2825 2594.53,2865.47 ; R21.2@2679.57,2930 2674.57,2925 C14.2@2594.53,2925 2594.53,2865.47 ; -68.79,660 cw(c-68.79,696.21) -94.39,670.61 ccw(c-68.79,696.21) -68.79,660 ; -68.79,660 ccw(c-68.79,623.79) -94.39,649.39 cw(c-68.79,623.79) -68.79,660 ; -44.64,660 cw(c-44.64,720.36) -87.32,677.68 ccw(c-44.64,720.36) -44.64,660 ; -44.64,660 ccw(c-44.64,599.64) -87.32,642.32 cw(c-44.64,599.64) -44.64,660 ; 2315,2621.72 cw(c2363.28,2621.72) 2329.14,2655.86 ccw(c2363.28,2621.72) 2315,2621.72 ; 2315,2621.72 ccw(c2266.72,2621.72) 2300.86,2655.86 cw(c2266.72,2621.72) 2315,2621.72 ; 2594.53,2865.47 cw(c2555.99,2826.93) 2610.48,2825.6 ccw(c2555.99,2826.93) 2594.53,2865.47 ; 2594.53,2865.47 ccw(c2633.07,2904.01) 2634.4,2849.52 cw(c2633.07,2904.01) 2594.53,2865.47 ; 2594.53,2878.89 cw(c2634.73,2878.89) 2606.3,2907.32 ccw(c2634.73,2878.89) 2594.53,2878.89 ; 2594.53,2878.89 ccw(c2554.32,2878.89) 2582.75,2907.32 cw(c2554.32,2878.89) 2594.53,2878.89 ; 2611.03,2848.97 cw(c2588.2,2826.14) 2620.48,2825.35 ccw(c2588.2,2826.14) 2611.03,2848.97 ; 2611.03,2848.97 ccw(c2633.86,2871.8) 2634.65,2839.52 cw(c2633.86,2871.8) 2611.03,2848.97 ; 2634.73,2925 cw(c2634.73,2965.21) 2606.3,2936.78 ccw(c2634.73,2965.21) 2634.73,2925 ; 2634.73,2925 ccw(c2634.73,2884.79) 2606.3,2913.22 cw(c2634.73,2884.79) 2634.73,2925 ; 2632.04,2925 ccw(c2632.04,2973.59) 2666.4,2939.23 cw(c2632.04,2973.59) 2632.04,2925 ; 2637.17,2925 cw(c2637.17,2883.67) 2666.4,2912.9 ccw(c2637.17,2883.67) 2637.17,2925
IPM_FO: I1.19 U10.2 | length 4502.8
  Top Layer w10: I1.19@-105,340 -5,340 195,140 910,140 970,200 970,740 1110,880 1110,2555 1321.67,2766.67 ; U10.2@1375,2766.67 1321.67,2766.67 ; -68.79,340 cw(c-68.79,376.21) -94.39,350.61 ccw(c-68.79,376.21) -68.79,340 ; -68.79,340 ccw(c-68.79,303.79) -94.39,329.39 cw(c-68.79,303.79) -68.79,340 ; -44.64,340 cw(c-44.64,400.36) -87.32,357.68 ccw(c-44.64,400.36) -44.64,340 ; -44.64,340 ccw(c-44.64,279.64) -87.32,322.32 cw(c-44.64,279.64) -44.64,340 ; 1321.67,2766.67 cw(c1321.67,2720.95) 1356.38,2750.7 ccw(c1321.67,2720.95) 1321.67,2766.67 ; 1321.67,2766.67 ccw(c1321.67,2812.38) 1356.38,2782.63 cw(c1321.67,2812.38) 1321.67,2766.67 ; 1343.41,2766.67 cw(c1343.41,2739.59) 1363.97,2757.21 ccw(c1343.41,2739.59) 1343.41,2766.67 ; 1343.41,2766.67 ccw(c1343.41,2793.74) 1363.97,2776.12 cw(c1343.41,2793.74) 1343.41,2766.67
IPM_NGND: C7.1 C8.1 C9.1 C10.1 C11.1 C12.1 C13.1 C14.1 I1.14 U4.5 U7.5 U9.5 U11.5 V1.2 | length 12915.8
  Top Layer w20: v1(2187.5,482.5) 2190,485 2470,485 2535,550 U4.5@2535,610 ; v1(2970,730) 3175,730 3390,515 5085,515 5200,630 V1.2@5295,630 ; 2535,562.86 cw(c2582.14,562.86) 2548.81,596.19 ccw(c2582.14,562.86) 2535,562.86 ; 2535,562.86 ccw(c2487.86,562.86) 2521.19,596.19 cw(c2487.86,562.86) 2535,562.86 ; 3006.21,730 cw(c3006.21,766.21) 2980.61,740.61 ccw(c3006.21,766.21) 3006.21,730 ; 3006.21,730 ccw(c3006.21,693.79) 2980.61,719.39 cw(c3006.21,693.79) 3006.21,730 ; 5247.86,630 cw(c5247.86,582.86) 5281.19,616.19 ccw(c5247.86,582.86) 5247.86,630 ; 5247.86,630 ccw(c5247.86,677.14) 5281.19,643.81 cw(c5247.86,677.14) 5247.86,630 ; v1@2198.11,471.89 cw(c2229.75,440.25) 2229.75,485 ccw(c2229.75,440.25) v1@2198.11,471.89 ; v1@2198.11,493.11 ccw(c2217.68,512.68) 2217.68,485 cw(c2217.68,512.68) v1@2198.11,493.11
  Bottom Layer w20: I1.14@-105,740 30,740 290,480 ; 287.5,482.5 v1(2187.5,482.5) ; C9.1@2884.53,1460 2884.53,1530.47 2870,1545 2550,1545 2525.47,1520.47 C10.1@2525.47,1460 ; C11.1@2894.53,2195 2894.53,2250.47 2870,2275 2550,2275 2530.47,2255.47 C12.1@2530.47,2195 ; C13.1@2894.53,2925 2894.53,2940.61 2858.14,2977 2571.86,2977 2535.47,2940.61 C14.1@2535.47,2925 2535,2924.53 U11.5@2535,2825 2535,2755 2470,2690 2470,2255.47 C12.1@2530.47,2195 ; v1(2970,730) 2945,705 C7.1@2884.53,705 2884.53,770.47 2865,790 2560,790 2540.47,770.47 C8.1@2540.47,710 2540.47,615.47 U4.5@2535,610 2470,675 2470,1200 2535,1265 U7.5@2535,1360 2525.47,1369.53 C10.1@2525.47,1460 ; -56.72,740 cw(c-56.72,788.28) -90.86,754.14 ccw(c-56.72,788.28) -56.72,740 ; -56.72,740 ccw(c-56.72,691.72) -90.86,725.86 cw(c-56.72,691.72) -56.72,740 ; 2151.29,482.5 cw(c2151.29,446.29) 2176.89,471.89 ccw(c2151.29,446.29) 2151.29,482.5 ; 2151.29,482.5 ccw(c2151.29,518.71) 2176.89,493.11 cw(c2151.29,518.71) 2151.29,482.5 ; 2501.66,643.34 cw(c2468.33,610) 2515.47,610 ccw(c2468.33,610) 2501.66,643.34 ; 2501.66,643.34 ccw(c2535,676.67) 2535,629.53 cw(c2535,676.67) 2501.66,643.34 ; 2525.47,1425.96 cw(c2553.61,1425.96) 2533.71,1445.85 ccw(c2553.61,1425.96) 2525.47,1425.96 ; 2525.47,1425.96 ccw(c2497.34,1425.96) 2517.23,1445.85 cw(c2497.34,1425.96) 2525.47,1425.96 ; C10.1@2525.47,1460 2460,1525.47 2460,1965 2535,2040 ; 2525.47,1494.04 cw(c2497.34,1494.04) 2517.23,1474.15 ccw(c2497.34,1494.04) 2525.47,1494.04 ; 2525.47,1494.04 ccw(c2553.61,1494.04) 2533.71,1474.15 cw(c2553.61,1494.04) 2525.47,1494.04 ; 2530.47,2160.96 cw(c2558.61,2160.96) 2538.71,2180.85 ccw(c2558.61,2160.96) 2530.47,2160.96 ; 2530.47,2160.96 ccw(c2502.34,2160.96) 2522.23,2180.85 cw(c2502.34,2160.96) 2530.47,2160.96 ; C12.1@2530.47,2195 2530.47,2084.53 U9.5@2535,2080 2535,2040 ; 2530.47,2229.04 cw(c2502.34,2229.04) 2522.23,2209.15 ccw(c2502.34,2229.04) 2530.47,2229.04 ; 2530.47,2229.04 ccw(c2558.61,2229.04) 2538.71,2209.15 cw(c2558.61,2229.04) 2530.47,2229.04 ; 2535,1312.86 cw(c2582.14,1312.86) 2548.81,1346.19 ccw(c2582.14,1312.86) 2535,1312.86 ; 2535,1312.86 ccw(c2487.86,1312.86) 2521.19,1346.19 cw(c2487.86,1312.86) 2535,1312.86 ; 2535,2040 cw(c2566.2,2040) 2547.01,2064.6 ccw(c2566.2,2040) 2535,2040 ; 2535,2040 ccw(c2503.8,2040) 2522.99,2064.6 cw(c2503.8,2040) 2535,2040 ; 2535,2777.86 cw(c2582.14,2777.86) 2548.81,2811.19 ccw(c2582.14,2777.86) 2535,2777.86 ; 2535,2777.86 ccw(c2487.86,2777.86) 2521.19,2811.19 cw(c2487.86,2777.86) 2535,2777.86 ; 2535,2872.14 cw(c2487.86,2872.14) 2521.19,2838.81 ccw(c2487.86,2872.14) 2535,2872.14 ; 2535,2872.14 ccw(c2582.14,2872.14) 2548.81,2838.81 cw(c2582.14,2872.14) 2535,2872.14 ; 2540.47,675.96 cw(c2568.61,675.96) 2548.71,695.85 ccw(c2568.61,675.96) 2540.47,675.96 ; 2540.47,675.96 ccw(c2512.34,675.96) 2532.23,695.85 cw(c2512.34,675.96) 2540.47,675.96 ; 2540.47,744.04 cw(c2512.34,744.04) 2532.23,724.15 ccw(c2512.34,744.04) 2540.47,744.04 ; 2540.47,744.04 ccw(c2568.61,744.04) 2548.71,724.15 cw(c2568.61,744.04) 2540.47,744.04 ; 2884.53,739.04 cw(c2856.39,739.04) 2876.29,719.15 ccw(c2856.39,739.04) 2884.53,739.04 ; 2884.53,739.04 ccw(c2912.66,739.04) 2892.77,719.15 cw(c2912.66,739.04) 2884.53,739.04 ; 2884.53,1494.04 cw(c2856.39,1494.04) 2876.29,1474.15 ccw(c2856.39,1494.04) 2884.53,1494.04 ; 2884.53,1494.04 ccw(c2912.66,1494.04) 2892.77,1474.15 cw(c2912.66,1494.04) 2884.53,1494.04 ; 2894.53,2229.04 cw(c2866.39,2229.04) 2886.29,2209.15 ccw(c2866.39,2229.04) 2894.53,2229.04 ; 2894.53,2229.04 ccw(c2922.66,2229.04) 2902.77,2209.15 cw(c2922.66,2229.04) 2894.53,2229.04 ; 2912.66,705 cw(c2912.66,733.13) 2892.77,713.24 ccw(c2912.66,733.13) 2912.66,705 ; 2912.66,705 ccw(c2912.66,676.87) 2892.77,696.76 cw(c2912.66,676.87) 2912.66,705 ; 2495.5,1489.98 ccw(c2525.47,1519.95) 2525.47,1477.56 cw(c2525.47,1519.95) 2495.5,1489.98 ; 2500.5,2224.98 ccw(c2530.47,2254.95) 2530.47,2212.56 cw(c2530.47,2254.95) 2500.5,2224.98 ; U4.5@2521.19,623.81 ccw(c2474.65,670.35) 2540.47,670.35 cw(c2474.65,670.35) U4.5@2521.19,623.81 ; U9.5@2521.19,2093.81 ccw(c2498.79,2116.21) 2530.47,2116.21 cw(c2498.79,2116.21) U9.5@2521.19,2093.81 ; 2525.47,1430.15 ccw(c2605.15,1430.15) 2548.81,1373.81 cw(c2605.15,1430.15) 2525.47,1430.15 ; C14.1@2527.23,2910.85 cw(c2508.48,2892.1) 2535,2892.1 ccw(c2508.48,2892.1) C14.1@2527.23,2910.85 ; 2530.47,2138.08 ccw(c2593.08,2138.08) 2548.81,2093.81 cw(c2593.08,2138.08) 2530.47,2138.08 ; 2535,2889.82 cw(c2564.75,2889.82) 2543.71,2910.85 ccw(c2564.75,2889.82) 2535,2889.82 ; 2540.47,643.93 ccw(c2568.93,643.93) 2548.81,623.81 cw(c2568.93,643.93) 2540.47,643.93